# EAGLE board ME433_proto_board (EAGLE 5.12)

Size 50 x 50 mm. Coordinates in mm from the lower left corner, seen from the top.
Outline: 0,0 50,0 50,50 0,50 0,0
Copper layers (1*16): Top 0.035mm / dielectric 1.5mm / Bottom 0.035mm
Design rules "default": minimum track width 10mil, minimum drill 24mil, track to track 8mil, track to pad 8mil, pad to pad 8mil, via to via 8mil, smd to smd 8mil, copper to edge 40mil, drill to drill 8mil, minimum pad ring 10mil, minimum via ring 8mil, stop-mask expansion 4mil, vias tented up to drill 0mil, thermal gap 10mil

## Footprints (pad centres in the part's own frame; a part is rotated, then mirrored left to right if it is on the bottom)
C1206 = smd 1.6 x 1.8: 1 -1.4,0; 2 1.4,0
CHIPLED_1206 = smd 1.5 x 1.5: A 0,-1.75; C 0,1.75
R1206 = smd 1.6 x 1.803: 1 -1.422,0; 2 1.422,0
1X04 = drill 1.016 pad 1.88 square: 1 0,0 | drill 1.016 pad 1.88 round: 2 2.54,0; 3 5.08,0; 4 7.62,0
HEADERS_PIC32 = drill 0.8 round: 1 1.27,34.29; 2 1.27,31.75; 3 1.27,29.21; 4 1.27,26.67; 5 1.27,24.13; 6 1.27,21.59; 7 1.27,19.05; 8 1.27,16.51; 9 1.27,13.97; 10 1.27,11.43; 11 1.27,8.89; 12 1.27,6.35; 13 1.27,3.81; 14 1.27,1.27; 15 8.89,1.27; 16 8.89,3.81; 17 8.89,6.35; 18 8.89,8.89; 19 8.89,11.43; 20 8.89,13.97; 21 8.89,16.51; 22 8.89,19.05; 23 8.89,21.59; 24 8.89,24.13; 25 8.89,26.67; 26 8.89,29.21; 27 8.89,31.75; 28 8.89,34.29 | hole 0.6: 1.27,16.51; 1.27,19.05; 1.27,21.59; 1.27,24.13; 1.27,26.67; 1.27,29.21; 1.27,31.75; 1.27,34.29; 1.27,13.97; 1.27,11.43; 1.27,8.89; 1.27,6.35; 1.27,3.81; 1.27,1.27; 8.89,34.29; 8.89,31.75; 8.89,29.21; 8.89,26.67; 8.89,24.13; 8.89,21.59; 8.89,19.05; 8.89,16.51; 8.89,13.97; 8.89,11.43; 8.89,8.89; 8.89,6.35; 8.89,3.81; 8.89,1.27
BUTTON_.1 = drill 0.8 round: 1 0,2.54; 2 0,-2.54 | hole 1: 0,2.5; 0,-2.5
RESONATOR_8MHZ = drill 0.8 round: GND 0,0; P1 0,2.54; P2 0,-2.54 | hole 0.6: 0,0; 0,2.5; 0,-2.5
SOT223 = smd 1.219 x 2.235: 1 -2.311,-3.099; 2 0,-3.099; 3 2.311,-3.099 | smd 3.6 x 2.2: 4 0,3.099
USB-MINIB = drill 0.8 round: D+ 4.064,0; D- 2.489,0.914; GND 4.064,-1.778; ID 2.489,-0.838; VBUS 4.064,1.702 | drill 1.9 round: P$6 -1.27,-3.65; P$7 -1.27,3.65
1X05 = drill 1.016 pad 1.88 square: 1 0,0 | drill 1.016 pad 1.88 round: 2 2.54,0; 3 5.08,0; 4 7.62,0; 5 10.16,0
CAP_POL_D = drill 0.7 pad 1.651 square: 1 1.27,0 | drill 0.7 pad 1.651 round: 2 -1.27,0

## Placement (x,y rotation side)
C1  0.1uF  [C1206]  38.1,20.32 90 top
C2  0.1uF  [C1206]  41.91,20.32 90 top
C3  0.1uF  [C1206]  34.29,20.32 90 top
LED1  [CHIPLED_1206]  34.29,12.7 0 top
LED2  [CHIPLED_1206]  41.91,12.7 0 top
LED3  [CHIPLED_1206]  38.1,12.7 0 top
R1  10K  [R1206]  12.7,26.67 0 top
R2  330  [R1206]  41.91,6.35 90 top
R3  330  [R1206]  38.1,6.35 90 top
R4  10K  [R1206]  12.7,21.59 0 top
R5  330  [R1206]  34.29,6.35 90 top
U$1  1X04_HEADER  [1X04]  1.27,35.56 270 top
U$2  1X04_HEADER  [1X04]  1.27,22.86 270 top
U$3  1X04_HEADER  [1X04]  48.26,22.86 270 top
U$4  1X04_HEADER  [1X04]  48.26,10.16 270 top
U$5  1X04_HEADER  [1X04]  1.27,10.16 270 top
U$6  PIC32_HEADER  [HEADERS_PIC32]  19.05,5.08 0 top
U$7  BUTTON  [BUTTON_.1]  12.7,34.29 0 top
U$8  BUTTON  [BUTTON_.1]  12.7,44.45 0 top
U$9  RESONATOR_8MHZ  [RESONATOR_8MHZ]  12.7,10.16 0 top
U$10  REG_3.3V_223  [SOT223]  44.45,31.75 0 top
U$11  USB  [USB-MINIB]  43.18,44.45 270 top
U$13  1X05_HEADER  [1X05]  30.48,46.99 180 top
U$15  CAP_POL  [CAP_POL_D]  35.56,29.21 0 top
U$16  CAP_POL  [CAP_POL_D]  35.56,36.83 0 top

## Library data of the parts
C1-C3 LED1-LED3 R1-R5 U$6-U$11 U$13 U$15 U$16 = ME433_Austin
U$1-U$5 = ME433

## Nets
3.3V: C3.1 R1.2 R4.2 U$5.4 U$6.13 U$6.23 U$6.28 U$13.2
5V: C2.1 U$4.4 U$6.15 U$10.3 U$10.4 U$11.VBUS
A0: U$1.2 U$6.2
A1: U$1.3 U$6.3
A4: U$5.1 U$6.12
B0: U$1.4 U$6.4 U$13.4
B1: U$2.1 U$6.5 U$13.5
B2: U$2.2 U$6.6
B3: U$2.3 U$6.7
B4: U$2.4 U$6.11
B5: U$5.2 U$6.14
B7: R3.2 U$4.2 U$6.16
B8: U$4.1 U$6.17
B9: U$3.4 U$6.18
B13: U$3.3 U$6.24
B14: U$3.2 U$6.25
B15: R2.2 U$3.1 U$6.26
D+: U$6.21 U$11.D+
D-: U$6.22 U$11.D-
GND: C1.2 C2.2 C3.2 LED1.C LED2.C LED3.C U$4.3 U$5.3 U$6.8 U$6.19 U$6.27 U$7.2 U$8.1 U$9.GND U$10.1 U$11.GND U$13.3 U$15.2 U$16.2
MCLR: R4.1 U$1.1 U$6.1 U$8.2 U$13.1
N$1: LED1.A R2.1
N$2: LED2.A R3.1
N$5: C1.1 R5.2 U$10.2 U$15.1
N$6: LED3.A R5.1
N$43: U$6.20 U$16.1
OSC1: U$6.9 U$9.P1
OSC2: U$6.10 U$9.P2
R13: R1.1 U$7.1

## Tracks (layer width: path | path; a pad name or v marks a point on that pad's centre or on a via)
3.3V  (7 unrouted)
5V  (5 unrouted)
A0  (1 unrouted)
A1  (1 unrouted)
A4  (1 unrouted)
B0  (2 unrouted)
B1  (2 unrouted)
B2  (1 unrouted)
B3  (1 unrouted)
B4  (1 unrouted)
B5  (1 unrouted)
B7  (2 unrouted)
B8  (1 unrouted)
B9  (1 unrouted)
B13  (1 unrouted)
B14  (1 unrouted)
B15  (2 unrouted)
D+  (1 unrouted)
D-  (1 unrouted)
GND  (18 unrouted)
MCLR  (4 unrouted)
N$1  (1 unrouted)
N$2  (1 unrouted)
N$5  (3 unrouted)
N$6  (1 unrouted)
N$43  (1 unrouted)
OSC1  (1 unrouted)
OSC2  (1 unrouted)
R13  (1 unrouted)

## Text on the board
tPlace: MCLR | A0 | A1 | B0 | ME433 2015 Proto Board | B15 | B1 | B14 | B2 | B13 | B3 | B9 | B4 | B8 | A4 | B7 | B5 | GND | GND | 5V | 3.3V
bPlace: MCLR | A0 | A1 | B0 | ME433 2015 Proto Board | B1 | B2 | B3 | B4 | A4 | B5 | GND | 3.3V